# Altium PCB PCB.PcbDoc
Units mil, origin at the board's own origin, x right, y up, seen from the top; angles counter-clockwise.
Board outline 1496.06 x 1496.06 mil, 2 copper layers (Top Layer, Bottom Layer); 32 components, 32 nets, 101 pads, 18 vias.
Unrouted connection lines stored in the file: 17.
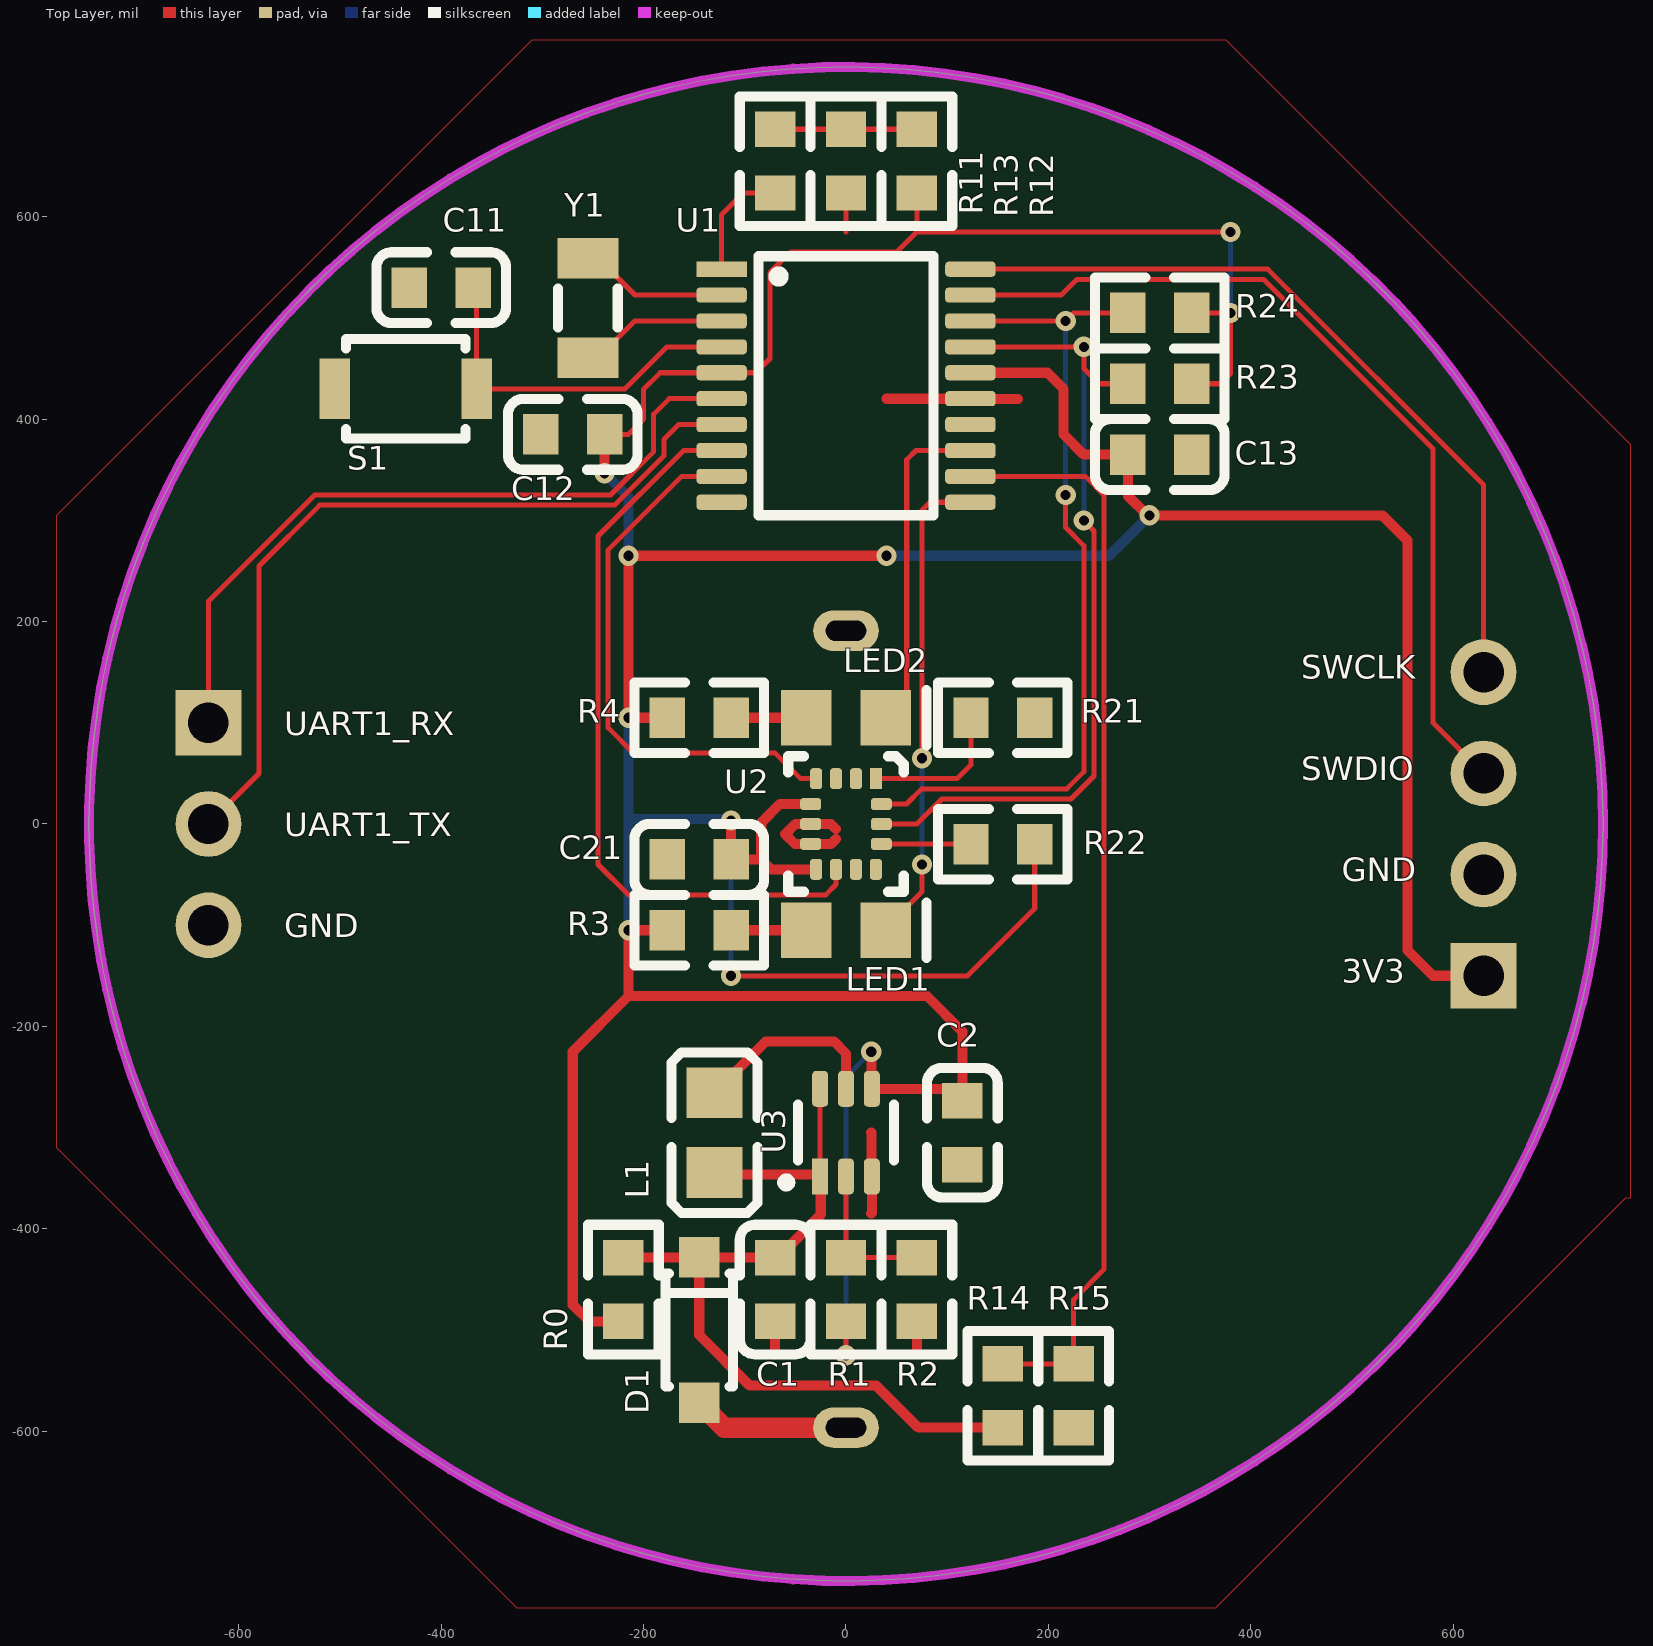
[diagram p0: Top Layer view]
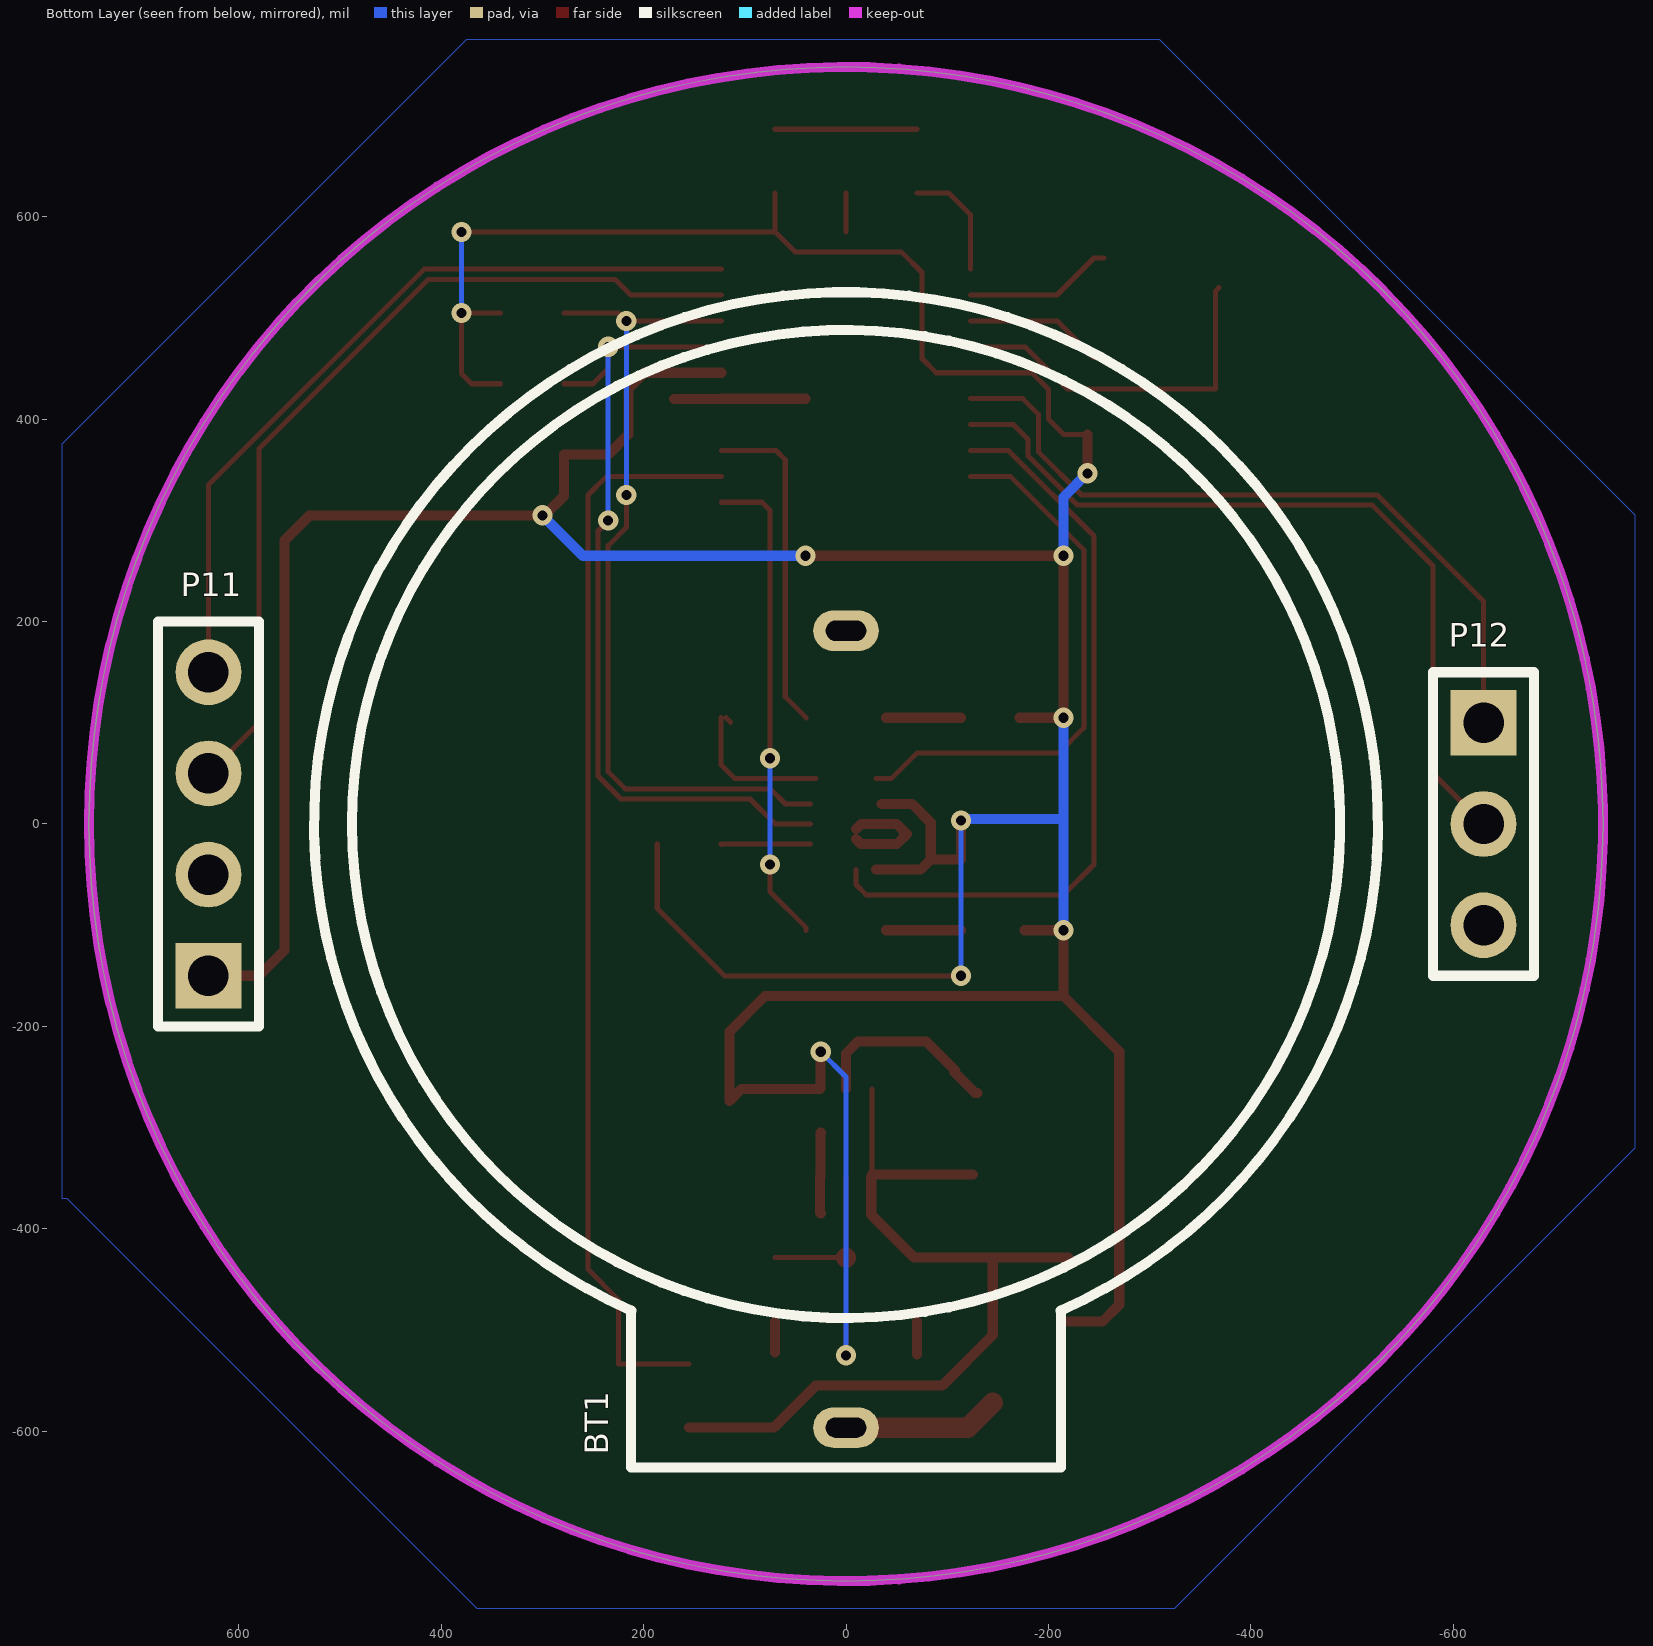
[diagram p1: Bottom Layer view, seen from below]

## Layer stack, top to bottom
Top Solder: solder mask 0.4, Solder Resist, Dk 3.5
Top Layer: signal copper 1.4
Dielectric 1: dielectric 12.6, FR-4, Dk 4.8
Bottom Layer: signal copper 1.4
Bottom Solder: solder mask 0.4, Solder Resist, Dk 3.5

## Board outline
-748.03,0 ccw(c0,0) 0,-748.03 ccw(c0,0) 748.03,0 ccw(c0,0) 0,748.03 ccw(c0,0)

## Design rules (kind name [scope] priority, off if disabled: settings)
Clearance Clearance_HighV [InNet('24V_OUT')] p1: gap=20 ignorepadtopadclearanceinfootprint=FALSE except(0: Arc-Hole Track-Hole SMDPad-Hole THPad-Hole Via-Hole Fill-Hole Poly-Hole Region-Hole Text-Hole)
Clearance Clearance_PolyBoradEdge [(InPolygon) vs OnLayer('Keep-Out Layer')] p2: gap=10 ignorepadtopadclearanceinfootprint=FALSE except(0: Arc-Hole Track-Hole SMDPad-Hole THPad-Hole Via-Hole Fill-Hole Poly-Hole Region-Hole Text-Hole)
Clearance Clearance_Ploy [(InPolygon)] p3: gap=15 ignorepadtopadclearanceinfootprint=FALSE
Clearance [All] p4: gap=5 ignorepadtopadclearanceinfootprint=FALSE except(0: Arc-Text Track-Text SMDPad-Text THPad-Text Via-Text Fill-Text Poly-Text Region-Text Text-Text Text-Hole)
HoleSize Testpoint [All] p2: absolutevalues=TRUE maxlimit=100 minlimit=1 maxpercent=80.000 minpercent=20.000
HoleSize TestPointUsage [All] p3: absolutevalues=TRUE maxlimit=100 minlimit=1 maxpercent=80.000 minpercent=20.000
MinimumSolderMaskSliver [All] p1: minsoldermaskwidth=1
PlaneConnect [All] p1: planeconnectstyle=Relief reliefexpansion=20 reliefentries=4 reliefconductorwidth=20 reliefairgap=10
PolygonConnect Via [isVia] p1: connectstyle=Direct reliefconductorwidth=10 reliefentries=4 polygonreliefangle="90 Angle" airgapwidth=10
PolygonConnect PolygonConnect_GND [All vs (InNet('SGND1') OR InNet('SGND2') OR InNet('GND'))] p2: connectstyle=Relief reliefconductorwidth=10 reliefentries=4 polygonreliefangle="90 Angle" airgapwidth=10
PolygonConnect [All vs (InPadClass('All Pads'))] p3: connectstyle=Direct reliefconductorwidth=20 reliefentries=4 polygonreliefangle="90 Angle" airgapwidth=10
RoutingVias [All] p1: holewidth=10 width=20 viastyle="Through Hole" minholewidth=1 minwidth=10 maxholewidth=99999 maxwidth=9999
SilkToSilkClearance [All] p1: silktosilkclearance=0
SilkToSolderMaskClearance [IsPad] p1: minsilkscreentomaskgap=1 clearancetoexposedcopper=TRUE
SolderMaskExpansion [All] p1: expansion=4 istentingtop=FALSE
Width [All] p1: maxlimit=100 minlimit=5 preferedwidth=10 minimp=50.000000 maximp=50.000000 favimp=50.000000
26 further rules are at their usual default settings.

## Components (designator, comment, footprint, x,y, rotation, side; value= is the part's Value field where it differs from the comment)
BT1 "2450" CR2450_CJ 0,0 r90 bottom locked
C1 "10uF" 0603-C -70,-460 r90 top
C2 "10uF" 0603-C 115,-305 r90 top
C11 "100nF" 0603-C -400,530 r180 top
C12 "10nF" 0603-C -270,385 r0 top
C13 "10nF" 0603-C 310,365 r180 top
C21 "10nF" 0603-C -145,-35 r0 top
D1 "SS34" SOD-123 -145,-500 r270 top
L1 "4.7uH" 0805-L -130,-305 r90 top
LED1 "白光" 0805-LED 0,-105 r180 top
LED2 "白光" 0805-LED 0,105 r180 top
P11 "SWD" "2.54mm 1x4P" 629.92,0 r0 bottom locked
P12 "UART1" "2.54mm 1x3P" -629.92,0 r180 bottom locked
R0 "0R" 0603-R -220,-460 r90 top
R1 "1M" 0603-R 0,-460 r270 top
R2 "200K" 0603-R 70,-460 r90 top
R3 "75R" 0603-R -145,-105 r180 top
R4 "75R" 0603-R -145,105 r180 top
R11 "10K" 0603-R -70,655 r90 top
R12 "0R" 0603-R 70,655 r90 top
R13 "0R" 0603-R 0,655 r90 top
R14 "1.1M" 0603-R 155,-565 r270 top
R15 "1M" 0603-R 225,-565 r90 top
R21 "4.7K" 0603-R 155,105 r0 top
R22 "6.8K" 0603-R 155,-20 r0 top
R23 "6..8K" 0603-R 310,435 r0 top
R24 "6.8K" 0603-R 310,505 r0 top
S1 "Tact Switch" TS-3025 -435,430 r180 top
U1 "STM32L011F4P6" TSSOP-20 0,433.07 r0 top
U2 "LSM6DSOWTR" LGA-14L(2.5x3.0) 0,0 r270 top
U3 "TPS61220DCKR" SC-70-6 0,-305 r90 top
Y1 "32.768k" SMD3215-2P -255,510 r90 top

## Footprints (in the part's own frame and the unit in brackets; to place one, negate y for a bottom-side part, rotate by r counter-clockwise, add the part's x,y. Pads: shape width x height; smd on the part's side, far side on the other; paste and mask are expansions set on the pad)
"2.54mm 1x3P" [mil]
  rect 65x65 hole 40: 1(0,100)
  round 65 hole 40: 2(0,0) 3(0,-100)
  silkscreen extent -50,-150 50,150
"2.54mm 1x4P" [mil]
  rect 65x65 hole 40: 1(0,150)
  round 65 hole 40: 2(0,50) 3(0,-50) 4(0,-150)
  silkscreen extent -50,-200 50,200
0603-C [mil]
  rect 35x40 smd: 1(-31.5,0) 2(31.5,0)
  silkscreen extent -64,-35 64,35, body extent -31,-15 31,15, height 30
0603-R [mil]
  rect 35x40 smd: 1(-31.5,0) 2(31.5,0)
  silkscreen extent -64,-35 64,35, body extent -35,-19 35,19, height 33
0805-L [mil]
  rect 50x55 smd: 1(-39.37,0) 2(39.37,0)
  silkscreen extent -79,-43 79,43
0805-LED [mil]
  rect 50x55 smd: 1(-39.37,0) 2(39.37,0)
  silkscreen extent -79,-28 -79,27, body extent -41,-18 41,18, height 33
CR2450_CJ [mil]
  oval 40x65 hole 20 slot 40 at 90 deg: 1(-596.46,0) 2(190.94,0)
  silkscreen extent -636,-526 525,526
LGA-14L(2.5x3.0) [mm]
  rect 0.525x0.3 smd mask+0.07: 1(-1.138,0.75)
  rrect50% 0.525x0.3 smd mask+0.07: 2(-1.138,0.25) 3(-1.138,-0.25) 4(-1.138,-0.75) 8(1.138,-0.75) 9(1.138,-0.25) 10(1.138,0.25) 11(1.138,0.75)
  rrect50% 0.3x0.526 smd mask+0.07: 5(-0.5,-0.887) 6(0,-0.887) 7(0.5,-0.887)
  rrect50% 0.3x0.525 smd mask+0.07: 12(0.5,0.887) 13(0,0.887) 14(-0.5,0.887)
  silkscreen extent -1.7,-1.45 1.7,1.45, body extent -1.5,-1.25 1.5,1.25, height 0.91
SC-70-6 [mm]
  rect 0.9x0.4 smd: 1(-1.1,0.65)
  rrect50% 0.9x0.4 smd: 2(-1.1,0) 3(-1.1,-0.65) 4(1.1,-0.65) 5(1.1,0) 6(1.1,0.65)
  silkscreen extent -1.35,-1.2 0.7,1.6
SMD3215-2P [mil]
  rect 40x60 smd: 1(-49.21,0) 2(49.21,0)
  silkscreen extent -19,-30 19,30, body extent -63,-30 63,30, height 30
SOD-123 [mil]
  rect 40x40 smd: 1(-71.77,0) 2(71.77,0)
  silkscreen extent -56,-33 56,33, body extent -73,-31 73,31, height 53
TS-3025 [mil] "XKB"
  rect 30x60 smd: 1(-70,0) 2(70,0)
  silkscreen extent -59,-49 59,49, body extent -79,-49 79,49, height 59
TSSOP-20 [mil]
  rect 50x15 smd: 1(-122.95,115.16)
  rrect50% 50x15 smd: 2(-122.95,89.57) 3(-122.95,63.98) 4(-122.95,38.39) 5(-122.95,12.8) 6(-122.95,-12.8) 7(-122.95,-38.39) 8(-122.95,-63.98) 9(-122.95,-89.57) 10(-122.95,-115.16) 11(122.95,-115.16) 12(122.95,-89.57) 13(122.95,-63.98) 14(122.95,-38.39) 15(122.95,-12.79) 16(122.95,12.8) 17(122.95,38.39) 18(122.95,63.98) 19(122.95,89.57) 20(122.95,115.16)
  silkscreen extent -87,-128 87,128, body extent -126,-128 126,128, height 47

## Part data
BT1: library part Battery, "Multicell Battery", LatestRevisionDate=17-Jul-2002, LatestRevisionNote="Re-released for DXP Platform.", PackageDescription="Battery; 2 Leads", PackageReference=BAT-2, Published=24-Mar-1999, Publisher="Altium Limited"
C1 C2 C11 C12 C13 C21: library part Cap
D1: library part Diode
L1: library part Inductor
LED1 LED2: library part LED
P11: library part "Header 1x4P"
P12: library part "Header 1x3P"
R0 R1 R2 R3 R4 R11 R12 R13 R14 R15 R21 R22 R23 R24: library part Res
U1: "Ultra-low-power 32-bit MCU Arm®-based /  Cortex®-M0+, 16KB Flash, 2KB SRAM, 512B EEPROM, ADC/TSSOP-20"
U2: "6-axis IMU (inertial measurement unit):  / always-on 3‑axis accelerometer and 3‑axis gyroscop"
U3: "TPS6122x Low Input Voltage, 0.7V Boost Converter With 5.5μA Quiescent Current"
Y1: library part XTAL

## Via types
v1: diameter 20, hole 10, Top Layer to Bottom Layer, tented both sides, 18 vias

## Nets (pads, with @x,y where several pads share a name; then routed paths per layer and width w, separated by ;. In a path a pad name is that pad's centre, name@x,y a point inside that pad or via, vN(x,y) a via of type N, cw(c..) or ccw(c..) an arc to the next point about the centre after c; other vN are vias at no path point)
BAT_VCC: C1.2 D1.1 L1.1 R0.2 R14.2 U3.1 U3.6 | length 848.5
  Top Layer w5: U3.1 -25.59,-346.34 U3.6 ; R14.2 R14.2
  Top Layer w10: R0.2 -219.86,-428.37 -145.14,-428.37 D1.1 ; L1.1@-125.53,-346.34 U3.1@-25.59,-346.34 ; C1.2@-72.64,-428.37 -144.86,-428.37 D1.1 ; C1.2 -67.5,-428.5 -25,-386 U3.1@-25,-348.9 ; R14.2 71.5,-596.5 30,-555 -95,-555 -145,-505 D1.1
DC_FB: R1.1 R2.2 U3.2 | length 150.2
  Top Layer w5: U3.2 R1.1 R2.2
GND: BT1.2 C1.1 C2.1 C11.2 C12.1 C13.1 C21.1 P11.2 P12.3 R2.1 R13.1 R15.1 R21.2 S1.2 U1.15 U2.6 U2.7 U3.3 | length 424.8
  Top Layer w5: 0,585 R13.1
  Top Layer w10: -70,-524 C1.1 ; -10,-15 -14.68,-19.68 -50.32,-19.68 -60,-10 -50,0 -15,0 -10,-5 ; 25,-385 25.59,-384.41 U3.3 25.3,-348.01 25.3,-305.3 25,-305 ; 40,420 40.14,420.14 122.81,420.14 U1.15 123.23,420 170,420 ; R2.1 70.3,-491.8 70.3,-522.23
LED_EN_1: LED1.1 U1.11 | length 481
  Top Layer w5: LED1.1 39.37,-102.5 75,-66.87 v1(75,-40) ; v1(75,65) 75,310 82.91,317.91 U1.11
  Bottom Layer w5: v1(75,-40) v1(75,65)
LED_EN_2: LED2.1 U1.13 | length 330.3
  Top Layer w5: LED2.1 60,125.63 60,360 69.09,369.09 U1.13
LSM_CS: R22.1 U2.12 | length 88.7
  Top Layer w5: U2.12 123.19,-19.68 R22.1
LSM_INT1: U1.9 U2.4 | length 544.3
  Top Layer w5: U1.9 -162.35,343.5 -235,270.86 -235,95 -210,70 -70,70 -44.8,44.8 U2.4
LSM_INT2: U1.8 U2.9 | length 748.4
  Top Layer w5: U1.8 -160.41,369.09 -245,284.5 -245,-40 -215,-70 -20,-70 -9.84,-59.84 U2.9
LSM_MI2C_SCL: U2.3
LSM_MI2C_SDA: U2.2
LSM_MSPI_OCS: U2.10
LSM_MSPI_SDO: U2.11
LSM_SI2C_SA0: R21.1 U2.1 | length 152.6
  Top Layer w5: U2.1 109.78,44.78 123.5,58.5 R21.1 ; R21.1@113.98,100.47 R21.1@118.5,105
LSM_SI2C_SCL: R23.1 U1.17 U2.13 | length 841.1
  Top Layer w5: U2.13 70,0 94.78,24.78 222.36,24.78 245,47.43 245,289.57 235,299.57 v1(235,300) ; U1.17 v1(235,471.46) 235,450 250,435 R23.1
  Bottom Layer w5: v1(235,300) v1(235,471.46)
LSM_SI2C_SDA: R24.1 U1.18 U2.14 | length 825
  Top Layer w5: U2.14 59.68,19.68 74.78,34.78 218.21,34.78 235,51.57 235,275 217.05,292.95 v1(217.05,325) ; U1.18 v1(217.05,497.05) 225,505 R24.1
  Bottom Layer w5: v1(217.05,325) v1(217.05,497.05)
LSM_VDDIO: C2.2 C12.2 C13.2 C21.2 P11.1 R0.1 R1.2 R3.2 R4.2 R12.1 R22.2 R23.2 R24.2 U1.5 U1.16 U2.5 U2.8 U3.4 | length 5386.4
  Top Layer w5: C12.2 -215,385 -200,400 -200,429.54 -183.67,445.87 U1.5 -89.13,445.87 -75,460 -75,545 -55,565 50,565 70,585 ; v1(-113.5,-150) 120,-150 186.5,-83.5 R22.2 ; v1(0,-525) R1.2 ; R12.1 70,585 ; R23.2 370,435 380,445 v1(380,505) R24.2 ; v1(380,585) 70,585
  Top Layer w10: v1(-238.5,346.5) C12.2 ; R0.1 -253.5,-491.5 -270,-475 -270,-225 -215,-170 ; R3.2 v1(-215,-105) -215,-170 ; R4.2@-171.5,105 R4.2 v1(-215,105) v1(-215,265) v1(40,265) ; v1(-113.5,3.5) C21.2 -83.75,-35 ; U2.5 -65.32,19.68 -83.75,1.25 -83.75,-35 ; U2.8 -29.72,-45 -73.75,-45 -83.75,-35 ; v1(25,-225) 25.3,-225.3 25.3,-261.4 U3.4 103.19,-261.69 C2.2 115,-205 80,-170 -215,-170 ; U1.16 199.13,445.87 215,430 215,385 235,365 C13.2 278.5,324.32 297.82,305 v1(300,305) 530,305 555,280 555,-125 580,-150 P11.1
  Bottom Layer w5: v1(-113.5,-150) v1(-113.5,3.5) ; v1(0,-525) 0,-250 v1(25,-225) ; v1(380,505) v1(380,585)
  Bottom Layer w10: v1(-238.5,346.5) -215,322.99 v1(-215,265) ; v1(-215,-105) -215,5 ; v1(-215,105) -215,5 ; v1(-113.5,3.5) -115,5 -215,5 ; v1(40,265) 260,265 v1(300,305)
MCU_BOOT: R11.1 U1.1 | length 115.7
  Top Layer w5: U1.1 -122.95,602.05 -101.5,623.5 R11.1
MCU_COMP2_INP: R14.1 R15.2 U1.12 | length 1080.6
  Top Layer w5: U1.12 236.5,343.5 255,325 255,-440 225,-470 R15.2 R14.1
MCU_OSC32_IN: U1.2 Y1.2 | length 147.2
  Top Layer w5: Y1.2 -245,559.21 -208.42,522.64 U1.2
MCU_OSC32_OUT: U1.3 Y1.1 | length 147.1
  Top Layer w5: Y1.1 -245,460.79 -208.74,497.05 U1.3
MCU_PA0: P12.1 U1.6 | length 731.8
  Top Layer w5: P12.1 -629.92,220.08 -525,325 -232.78,325 -190,367.78 -190,405 -174.72,420.28 U1.6
MCU_PA1: P12.2 U1.7 | length 800.2
  Top Layer w5: P12.2 -580,49.92 -580,255 -520,315 -228.64,315 -180,363.64 -180,380 -165.32,394.68 U1.7
MCU_PA4: U1.10
MCU_PA13: P11.3 U1.19 | length 874.4
  Top Layer w5: U1.19 212.64,522.64 228.23,538.23 412.63,538.23 580,370.86 580,99.92 P11.3
MCU_PA14: P11.4 U1.20 | length 780.3
  Top Layer w5: U1.20 416.77,548.23 629.92,335.08 P11.4
MCU_PB1: U1.14
NetBT1_1: BT1.1 D1.2 | length 155.2
  Top Layer w20: D1.2 -120.32,-596.46 BT1.1
NetL1_2: L1.2 U3.5 | length 192.3
  Top Layer w10: L1.2 -127.5,-265.63 -107.5,-245.63 -107.5,-243.13 -79.37,-215 -11.72,-215 0,-226.72 U3.5
NetLED1_2: LED1.2 R3.1 | length 74.1
  Top Layer w10: R3.1 LED1.2
NetLED2_2: LED2.2 R4.1 | length 74.1
  Top Layer w10: R4.1 LED2.2
NetR11_2: R11.2 R12.2 R13.2 | length 140
  Top Layer w5: R11.2 R13.2 R12.2
NRST: C11.1 S1.1 U1.4 | length 360.7
  Top Layer w5: C11.1 -365,526.5 S1.1 -218.32,430 -176.86,471.46 U1.4

## Polygon pours and split planes (outlines as drawn)
GND on Bottom Layer "GND_B" (solid, remove dead copper, shelved, pour order 0): 375,775 775,375 775,-370 770,-370 365,-775 -325,-775 -780,-320 -780,305 -310,775
GND on Top Layer "GND_L" (solid, remove dead copper, shelved, pour order 1): 375,775 775,375 775,-370 770,-370 365,-775 -325,-775 -780,-320 -780,305 -310,775

## Keep-outs
Keep-Out Layer:
  circle w10: c0,0 r748.03

## Silkscreen, mask and mechanical layers (free items; w line width, h text height)
Top Overlay:
  text "SWCLK" at 450,135.44 h40
  text "UART1_RX" at -555,80 h40
  text "SWDIO" at 450,35.44 h40
  text "UART1_TX" at -555,-20 h40
  text "GND" at 490,-64.56 h40
  text "GND" at -555,-120 h40
  text "3V3" at 490,-164.56 h40
Drill Guide:
  text "The position of LSD6D no need to be centered. / All TestPoint need to be fan-out." at -1755,160 h40
Mechanical 1:
  circle w10: c0,0 r748.03